# Altium PCB CH565W-R0-1v1.PcbDoc (part 2 of 4)
Units mil, origin at the board's own origin, x right, y up, seen from the top; angles counter-clockwise.
Board outline 3947.04 x 3947.04 mil, 4 copper layers (Top Layer, Layer 1, Layer 2, Bottom Layer), stack 23.756 mil thick; 204 components, 168 nets, 932 pads, 1005 vias.
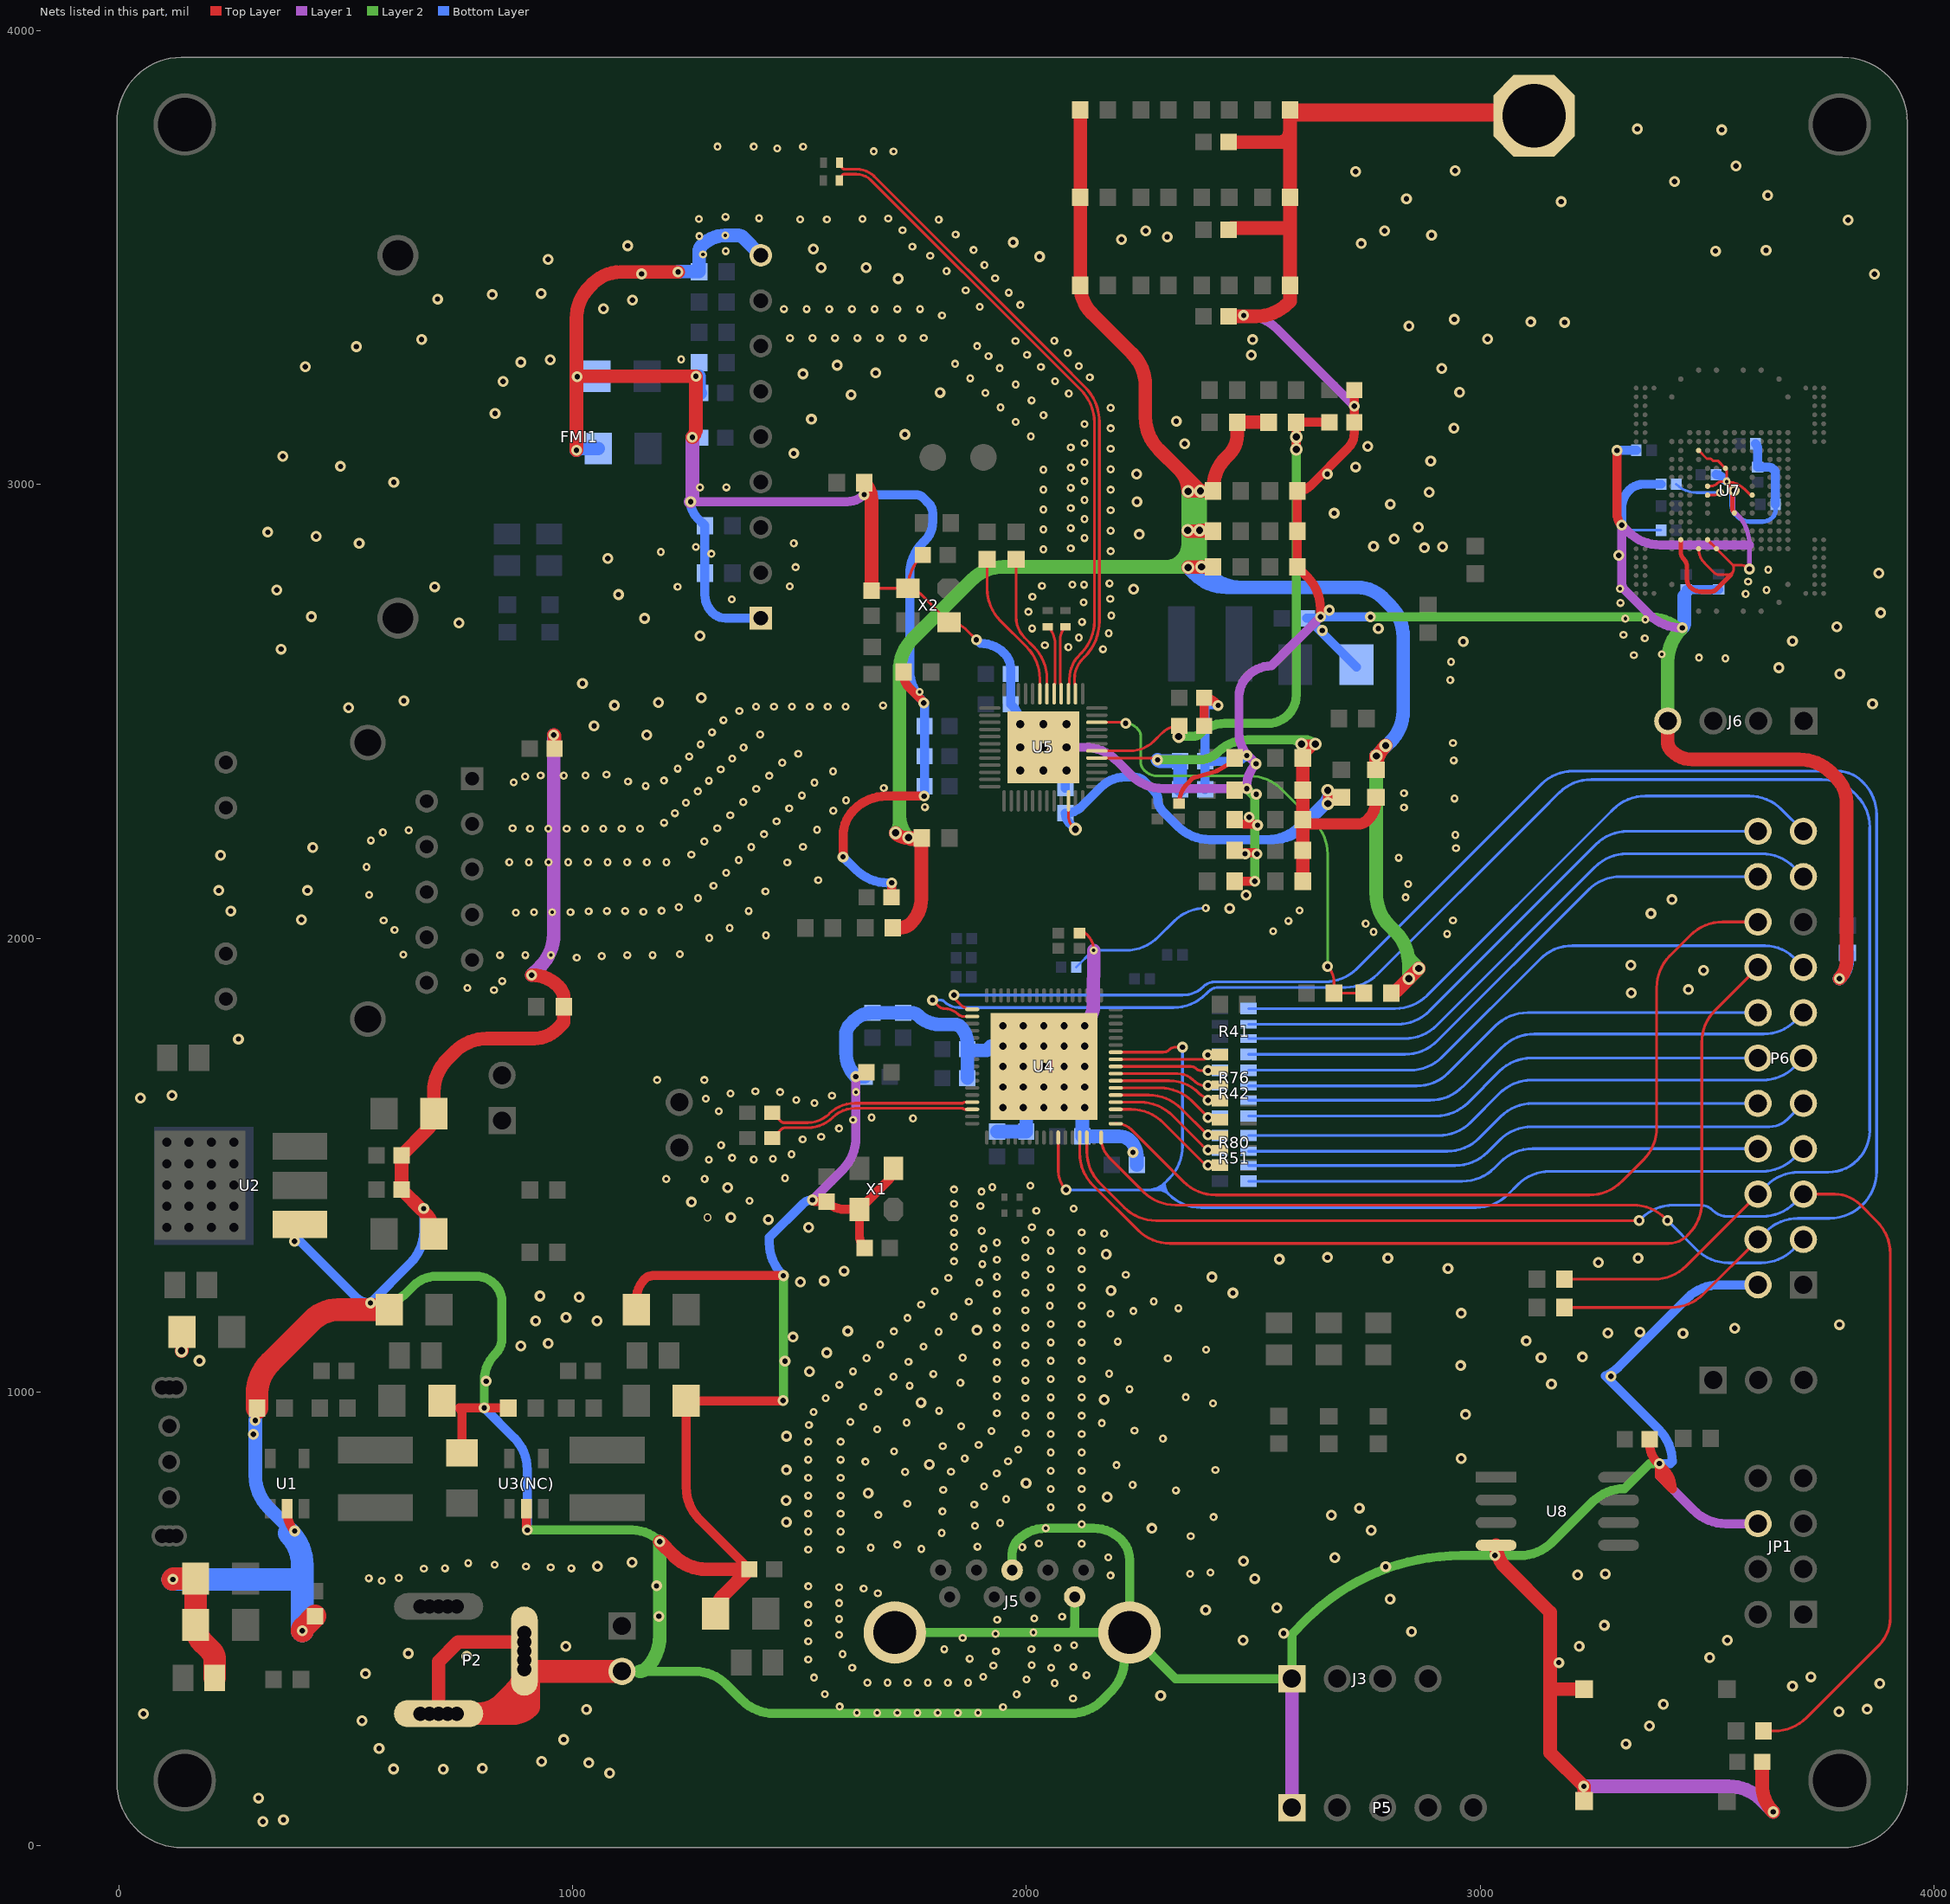
[diagram p4: the nets of this part, all layers, seen from the top]

## Via types
v1: diameter 17.72, hole 7.87, Top Layer to Bottom Layer, tented both sides, 564 vias
v2: diameter 24, hole 12, Top Layer to Bottom Layer, tented both sides, 371 vias
v3: diameter 28, hole 16, Top Layer to Bottom Layer, tented both sides, 64 vias
v4: diameter 26, hole 14, Top Layer to Bottom Layer, tented both sides, 2 vias
v5: diameter 19.68, hole 10, Top Layer to Bottom Layer, tented both sides, 1 vias
v6: diameter 20, hole 10, Top Layer to Bottom Layer, tented both sides, 1 vias
v7: diameter 32, hole 18, Top Layer to Bottom Layer, tented both sides, 1 vias
v8: diameter 17.72, hole 12, Top Layer to Bottom Layer, tented both sides, 1 vias

## Nets (pads, with @x,y where several pads share a name; then routed paths per layer and width w, separated by ;. In a path a pad name is that pad's centre, name@x,y a point inside that pad or via, vN(x,y) a via of type N, cw(c..) or ccw(c..) an arc to the next point about the centre after c; other vN are vias at no path point) (continued)
CMD_2: R79.1 U7.R5 | length 130.2
  Top Layer w6: U7.R5@3501.47,2976.74 3515.72,2976.74 ccw(c3515.72,2995.22) v1(3528.79,2982.15)
  Bottom Layer w6: R79.1@3432.34,3000.83 ccw(c3477.44,3045.93) 3477.44,2982.15 v1(3528.79,2982.15)
DATA0: R41.5 R76.1 U4.27 | length 235.5
  Top Layer w6: U4.27@2196.78,1732.87 2390.04,1732.87 ccw(c2390.04,1742.61) v2(2399.78,1742.61) 2426.52,1742.61 R76.1@2426.52,1742.82
DATA1: R42.4 R76.2 U4.26 | length 205.7
  Top Layer w6: U4.26@2196.78,1717.12 2362.17,1717.12 cw(c2362.17,1699.04) 2374.96,1711.83 ccw(c2383.66,1720.52) 2383.66,1708.22 v2(2400.13,1708.22)
DATA2: R42.3 R76.3 U4.25 | length 210.8
  Top Layer w6: U4.25@2196.78,1701.37 2333.33,1701.37 cw(c2333.33,1653.71) 2367.03,1687.41 2367.21,1687.24 ccw(c2400.13,1720.16) v2@2400.13,1673.6
  other v2: 2400.13,1675.6
DATA3: R42.2 R76.4 U4.24 | length 241.4
  Top Layer w6: U4.24@2196.78,1685.63 2314.57,1685.63 cw(c2314.57,1592.62) 2380.34,1658.38 ccw(c2419.81,1697.85) 2419.81,1642.03 R76.4@2426.52,1642.03
  other v2: 2400.13,1642.97
DATA4: R42.1 R80.1 U4.23 | length 252.2
  Top Layer w6: U4.23@2196.78,1669.88 2294.3,1669.88 cw(c2294.3,1569.88) 2365.01,1640.59 2390.65,1614.95 ccw(c2426.52,1650.83) R80.1@2426.52,1600.1
  other v2: 2400.13,1604.35
DATA5: R51.4 R80.2 U4.22 | length 234.4
  Top Layer w6: U4.22@2196.78,1654.13 2269.88,1654.13 cw(c2269.88,1554.13) 2340.59,1624.84 v2@2399.07,1566.36
  other v2: 2400.13,1566.73
DATA6: R51.3 R80.3 U4.21 | length 267.4
  Top Layer w6: U4.21@2196.78,1638.38 2250.8,1638.38 cw(c2250.8,1538.38) 2321.51,1609.09 2387.57,1543.03 ccw(c2409.48,1564.94) 2409.48,1533.95 R80.3@2426.52,1533.95
  other v2: 2400.13,1533.1
DATA7: R51.2 R80.4 U4.20 | length 275.9
  Top Layer w6: U4.20@2196.78,1622.63 2230.76,1622.63 cw(c2230.76,1522.63) 2301.47,1593.34 2391.19,1503.62 ccw(c2399.07,1511.5) 2399.07,1500.36 ccw(c2401.61,1502.89) 2401.61,1499.31 R80.4@2426.52,1499.31
  other v2: 2400.13,1499.48
DP_CLK: P6.16 U4.14 | length 2123.8
  Top Layer w6.07: U4.14@2117.33,1560.34 2117.33,1526.1 ccw(c2217.33,1526.1) 2146.62,1455.39 2245.57,1356.45 ccw(c2316.28,1427.16) 2316.28,1327.16 3415.48,1327.16 ccw(c3415.48,1385.38) 3456.65,1344.21 3459.6,1347.16 ccw(c3389.29,1417.47) 3488.72,1417.47 3488.72,1770.43 cw(c3588.72,1770.43) 3518.01,1841.14 P6.16@3612.66,1935.79
DP_D0: P6.8 R51.8 | length 1144.2
  Bottom Layer w6.07: R51.8@2489.51,1464.19 2960.97,1464.19 ccw(c2960.97,1564.19) 3031.68,1493.48 3044.7,1506.5 cw(c3115.41,1435.79) 3115.41,1535.79 P6.8@3612.66,1535.79
DP_D1: P6.9 R51.7 | length 1268.8
  Bottom Layer w6.07: R51.7@2489.51,1498.84 2945.61,1498.84 ccw(c2945.61,1598.84) 3016.32,1528.13 3043.18,1554.99 cw(c3113.89,1484.28) 3113.89,1584.28 3637.83,1584.28 ccw(c3637.83,1640.61) 3677.65,1600.78 P6.9@3712.66,1635.79
DP_D2: P6.10 R51.6 | length 1158.2
  Bottom Layer w6.07: R51.6@2489.51,1530.33 2927.82,1530.33 ccw(c2927.82,1630.33) 2998.53,1559.62 3045.4,1606.5 cw(c3116.12,1535.79) 3116.12,1635.79 P6.10@3612.66,1635.79
DP_D3: P6.11 R51.5 | length 1281
  Bottom Layer w6.07: R51.5@2489.51,1564.98 2908.65,1564.98 ccw(c2908.65,1664.98) 2979.36,1594.27 3042.87,1657.78 cw(c3113.58,1587.06) 3113.58,1687.06 3622.52,1687.06 ccw(c3622.52,1787.06) 3693.23,1716.35 P6.11@3712.66,1735.79
DP_D4: P6.12 R42.8 | length 1167.5
  Bottom Layer w6.07: R42.8@2489.51,1608.03 2902.69,1608.03 ccw(c2902.69,1708.03) 2973.4,1637.32 3042.58,1706.5 cw(c3113.29,1635.79) 3113.29,1735.79 P6.12@3612.66,1735.79
DP_D5: P6.13 R42.7 | length 1290.4
  Bottom Layer w6.07: R42.7@2489.51,1642.68 2890.2,1642.68 ccw(c2890.2,1742.68) 2960.91,1671.96 3048.37,1759.43 cw(c3119.08,1688.71) 3119.08,1788.71 3625.78,1788.71 ccw(c3625.78,1884.82) 3693.74,1816.86 P6.13@3712.66,1835.79
DP_D6: P6.14 R42.6 | length 1181.5
  Bottom Layer w6.07: R42.6@2489.51,1674.17 2860.13,1674.17 ccw(c2860.13,1774.17) 2930.84,1703.46 3033.87,1806.5 cw(c3104.58,1735.79) 3104.58,1835.79 P6.14@3612.66,1835.79
DP_D7: P6.15 R42.5 | length 1344.2
  Bottom Layer w6.07: R42.5@2489.51,1708.82 2845.71,1708.82 ccw(c2845.71,1808.82) 2916.42,1738.11 3132.47,1954.16 cw(c3203.18,1883.45) 3203.18,1983.45 3628.41,1983.45 cw(c3628.41,1895.11) 3690.88,1957.57 P6.15@3712.66,1935.79
DP_D8: P6.20 R41.4 | length 1276.9
  Bottom Layer w6.07: R41.4@2489.51,1743.93 2834.65,1743.93 ccw(c2834.65,1843.93) 2905.36,1773.22 3238.64,2106.5 cw(c3309.35,2035.79) 3309.35,2135.79 P6.20@3612.66,2135.79
DP_D9: P6.19 R41.3 | length 1400
  Bottom Layer w6.07: R41.3@2489.51,1778.58 2833.7,1778.58 ccw(c2833.7,1878.58) 2904.41,1807.87 3253.47,2156.93 cw(c3324.18,2086.22) 3324.18,2186.22 3620.81,2186.22 cw(c3620.81,2086.22) 3691.52,2156.93 P6.19@3712.66,2135.79
DP_D10: P6.22 R41.2 | length 1290.9
  Bottom Layer w6.07: R41.2@2489.51,1810.08 2817.37,1810.08 ccw(c2817.37,1910.08) 2888.08,1839.37 3255.21,2206.5 cw(c3325.92,2135.79) 3325.92,2235.79 P6.22@3612.66,2235.79
DP_D11: P6.21 R41.1 | length 1436.5
  Bottom Layer w6.07: R41.1@2489.51,1844.72 2812.59,1844.72 ccw(c2812.59,1944.72) 2883.3,1874.01 3282.19,2272.91 3293.33,2284.04 cw(c3364.04,2213.33) 3364.04,2313.33 3593.7,2313.33 cw(c3593.7,2213.33) 3664.41,2284.04 P6.21@3712.66,2235.79
DP_HREF: P6.5 R27.1 U4.15 | length 3176.3
  Top Layer w6.07: U4.15@2133.08,1560.34 2133.08,1529.93 ccw(c2233.08,1529.93) 2162.37,1459.21 2214.95,1406.63 ccw(c2285.66,1477.34) 2285.66,1377.34 v2(3350.77,1377.34) ; R27.1@3624.9,252.09 3648.7,252.09 ccw(c3648.7,352.09) 3719.41,281.37 3878.66,440.63 ccw(c3816.73,502.56) 3904.31,502.56 3904.31,1304.48 ccw(c3804.31,1304.48) 3875.02,1375.19 3837.65,1412.57 ccw(c3781.59,1356.5) 3781.59,1435.79 P6.5@3718.64,1435.79
  Bottom Layer w6.07: v2(3350.77,1377.34) 3355.64,1382.21 cw(c3426.35,1311.5) 3426.35,1411.5 3485.15,1411.5 cw(c3485.15,1372) 3513.08,1399.93 ccw(c3545.42,1432.27) 3545.42,1386.53 3621.99,1386.53 ccw(c3621.99,1486.53) 3692.7,1415.82 P6.5@3712.66,1435.79
DP_PWDN: P6.18 U4.18 | length 1936.4
  Top Layer w6.07: U4.18@2196.78,1591.14 2199.66,1591.14 cw(c2199.66,1546.52) 2231.21,1578.07 2346.1,1463.18 ccw(c2416.81,1533.9) 2416.81,1433.9 3241.27,1433.9 ccw(c3241.27,1533.9) 3311.99,1463.18 3360.01,1511.21 ccw(c3289.3,1581.92) 3389.3,1581.92 3389.3,1890.85 cw(c3489.3,1890.85) 3418.59,1961.56 3463.53,2006.5 cw(c3534.24,1935.79) 3534.24,2035.79 P6.18@3612.66,2035.79
DP_RESET: P6.7 U4.11 U4.28 | length 2382.8
  Top Layer w6: U4.11@2070.09,1560.34 2070.09,1486.96 ccw(c2129.33,1486.96) v2(2087.44,1445.06) ; U4.28@2196.78,1748.62 2301.85,1748.62 ccw(c2301.85,1767.37) 2315.11,1754.11 cw(c2328.37,1740.85) 2328.37,1759.6 v2(2343.86,1759.6)
  Bottom Layer w6: v2(2087.44,1445.06) 2268.26,1445.06 ; 2295.79,1446.3 2299.31,1449.83 ; 2303.99,1453.09 ccw(c2303.99,1449.66) 2301.57,1452.08 2299.31,1449.83 ; 2313.86,1435.28 ccw(c2384.57,1505.99) 2384.57,1405.99 2991.19,1405.99 ccw(c2991.19,1505.99) 3061.9,1435.28 3083.28,1456.66 cw(c3153.99,1385.95) 3153.99,1485.95 3621.4,1485.95 ccw(c3621.4,1585.95) 3692.11,1515.24 P6.7@3712.66,1535.79 ; v2(2343.86,1759.6) 2343.86,1540.73 cw(c2243.86,1540.73) 2314.57,1470.02 2304.72,1460.17 ; 2268.26,1445.06 ccw(c2268.26,1496.63) 2295.99,1453.15 ; 2268.26,1445.06 2290.24,1445.06 ; 2290.24,1445.06 cw(c2291.75,1445.06) 2290.68,1446.13 2296.85,1452.29 ; 2290.24,1445.06 cw(c2290.24,1411.67) 2313.85,1435.29 ; 2295.99,1453.15 ccw(c2268.26,1496.63) 2304.72,1460.17 ; 2295.99,1453.15 2296.85,1452.29 ; 2296.85,1452.29 2304.72,1460.17 ; 2296.85,1452.29 2299.31,1449.83 ; 2299.31,1449.83 2313.85,1435.29 ; 2304.72,1460.17 2304.72,1457.34 ccw(c2335.91,1457.34) 2313.85,1435.29
DP_SCL: P6.4 R65.1 U4.52 | length 3946.9
  Top Layer w6.07: v2@1834.14,1873.51 1853.32,1854.33 ccw(c1880.41,1881.43) U4.52@1880.41,1843.11 ; R65.1@3184.61,1185.93 3421.39,1185.93 ccw(c3421.39,1285.93) 3492.1,1215.22 P6.4@3612.66,1335.79
  Bottom Layer w6.07: v2(1840.14,1874.51) 2344.63,1874.51 ccw(c2344.63,1939.35) 2362.64,1877.06 ccw(c2344.63,1939.35) 2376.51,1882.88 ccw(c2344.63,1939.35) 2390.48,1893.5 cw(c2415.41,1868.57) 2415.41,1903.82 2657.99,1903.82 ccw(c2657.99,2003.82) 2728.7,1933.11 3090.62,2295.03 3134.64,2339.06 cw(c3205.35,2268.35) 3205.35,2368.35 3787.69,2368.35 cw(c3787.69,2291.49) 3842.04,2345.84 3844.77,2343.11 cw(c3774.06,2272.4) 3874.06,2272.4 3874.06,2228.03 3874.06,1486.1 cw(c3770.2,1486.1) 3770.2,1382.24 3700.54,1382.24 ccw(c3700.54,1282.24) 3629.83,1352.96 P6.4@3612.66,1335.79
DP_SDA: P6.6 R64.1 U4.53 | length 3909.3
  Top Layer w6.07: v2(1792.99,1863.44) 1806.45,1849.97 ccw(c1819.12,1862.64) 1819.12,1844.73 cw(c1819.12,1801.49) 1849.69,1832.07 ccw(c1861.05,1843.43) 1861.05,1827.36 U4.53@1880.41,1827.36 ; R64.1@3182.86,1248.07 3383.52,1248.07 ccw(c3383.52,1348.07) 3454.23,1277.36 P6.6@3612.66,1435.79
  Bottom Layer w6.07: v2(1792.99,1863.44) 1811.08,1863.44 cw(c1811.08,1852.38) 1818.89,1860.2 ccw(c1850.61,1891.92) 1850.61,1847.06 2324.48,1847.06 ccw(c2324.48,1947.06) 2395.19,1876.35 2400.98,1882.14 cw(c2423.81,1859.31) 2423.81,1891.6 2703.84,1891.6 ccw(c2703.84,1991.6) 2774.55,1920.88 3132.01,2278.35 3174.22,2320.55 cw(c3244.93,2249.84) 3244.93,2349.84 3753.73,2349.84 cw(c3753.73,2249.84) 3824.44,2320.55 3829.84,2315.15 cw(c3759.13,2244.44) 3859.13,2244.44 3859.13,2207.64 3859.13,1575.61 cw(c3767.56,1575.61) 3767.56,1484.05 3702.34,1484.05 ccw(c3702.34,1384.05) 3631.63,1454.76 P6.6@3612.66,1435.79
DP_SYNC: P6.3 U4.17 | length 1679.2
  Top Layer w6.07: U4.17@2164.58,1560.34 ccw(c2227.67,1560.34) 2183.06,1515.73 2257.9,1440.89 ccw(c2328.61,1511.6) 2328.61,1411.6 3337.44,1411.6 cw(c3337.44,1311.6) 3408.15,1382.31 v2(3413.12,1377.34)
  Bottom Layer w6.07: v2(3413.12,1377.34) 3476.94,1313.52 ccw(c3547.65,1384.23) 3547.65,1284.23 3619.68,1284.23 ccw(c3619.68,1384.23) 3690.39,1313.52 P6.3@3712.66,1335.79
DVDD10: C52.2 R56.2 U5.22 | length 1201.1
  Top Layer w6: U5.22@2092.35,2302.68 2092.35,2272.72 ccw(c2138.17,2272.72) v3@2105.77,2240.32
  Top Layer w20: v3(2663.95,2325.72) 2663.95,2297.9 ccw(c2665.54,2297.9) v3(2664.42,2296.78) ; 2665.42,2310.78 2665.59,2310.61 R56.2@2694.06,2310.61
  Bottom Layer w20: v3(2107.77,2240.32) 2094.9,2253.2 cw(c2117.29,2275.59) C52.2@2085.63,2275.59 ccw(c2085.63,2327.11) 2122.06,2290.68 2164.91,2333.53 cw(c2217.16,2281.29) 2217.16,2355.17 2237.13,2355.17 cw(c2237.13,2322.58) 2260.18,2345.63 2282.04,2323.77 cw(c2263.77,2305.51) 2289.6,2305.51 ccw(c2325.58,2305.51) 2300.12,2280.08 2333.6,2246.61 ccw(c2404.31,2317.32) 2404.31,2217.32 2530.53,2217.32 ; 2530.53,2217.32 ccw(c2530.53,2317.32) 2601.24,2246.61 ; 2530.53,2217.32 ccw(c2530.53,2317.32) 2601.24,2246.61 ; 2530.53,2217.32 2543.53,2217.32 ccw(c2543.53,2317.32) 2614.24,2246.61 v3(2664.42,2296.78) ; 2601.24,2246.61 v3@2652.36,2297.72 ; v3@2652.36,2297.72 ccw(c2624.36,2325.72) v3@2663.95,2325.72 ; v3@2652.36,2297.72 v3@2663.95,2309.32 ; v3@2663.95,2309.32 v3(2663.95,2325.72) ; v3@2663.95,2309.32 2663.95,2297.9 ccw(c2665.54,2297.9) v3(2664.42,2296.78) ; v3@2663.95,2309.32 v3@2664.42,2309.78 ; v3@2663.95,2325.72 cw(c2662.83,2324.6) 2664.42,2324.6 v3@2664.42,2309.78 ; v3(2664.42,2296.78) v3@2664.42,2309.78
DVDD33: R17.2 R18.1 R28.1 R35.2 R37.1 R39.1 R43.2 R53.1 R57.1 R63.2 R66.1 R70.1 | length 5174
  Top Layer w30: R43.2@1705.4,2023.17 1721.35,2023.17 ccw(c1721.35,2057.54) 1745.65,2033.23 ccw(c1691.21,2087.68) 1768.21,2087.68 1768.21,2217.84 1749.32,2217.84 cw(c1749.32,2231.33) v3@1740.88,2220.81 ; v3(1711.3,2232) ccw(c1738.32,2259.02) 1738.32,2220.81 v3@1740.88,2220.81 ; v3(1739.79,2221.79) ccw(c1749.32,2231.33) v3@1740.88,2220.81 ; R53.1@1769.44,2220.81 v3@1740.88,2220.81 ; R66.1@2118.6,3823.63 R57.1@2118.6,3633.33 R70.1@2118.6,3439.1 ccw(c2205.54,3439.1) 2144.06,3377.62 2232.9,3288.78 cw(c2162.19,3218.07) 2262.19,3218.07 2262.19,3148.47 ccw(c2362.19,3148.47) 2291.48,3077.76 2336.65,3032.6 ; v3(2356.23,2817.13) cw(c2359.28,2814.07) 2359.28,2818.39 v3@2386.09,2818.39 ; v3@2356.23,2897.13 R37.1@2411.47,2897.13 ccw(c2406.24,2891.9) 2406.24,2899.3 v3(2381.77,2899.3) ; v3(2385.96,2818.51) v3@2386.09,2818.39 ; R28.1@2411.47,2818.39 v3@2386.09,2818.39 ; R18.1@2533.95,3137.48 R17.2@2464.53,3137.48 2464.53,3108.65 cw(c2405.98,3108.65) 2447.39,3067.26 2440.76,3060.63 ccw(c2511.47,2989.92) 2411.47,2989.92 R39.1@2411.47,2985.87 v3@2383.72,2985.87 ; R63.2@2770.33,2371.24 R63.2@2770.33,2372.53 ; v3(2771.11,2401.8) ccw(c2773.01,2399.9) 2770.33,2399.9 R63.2@2770.33,2372.53 ; v3(2791.87,2424.54) ccw(c2843.89,2372.53) R63.2@2770.33,2372.53 ; v3(2842.78,1910.56) 2816.38,1884.17 cw(c2804.2,1896.36) R35.2@2804.2,1879.13 ccw(c2804.2,1895.41) 2815.71,1883.9 v3(2865.11,1933.29) ; 2336.65,3032.6 cw(c2289.38,2985.32) v3(2356.23,2985.32) cw(c2357.55,2984.01) 2357.55,2985.87 v3@2383.38,2985.87 ; 2336.65,3032.6 v3@2383.38,2985.87 ; v3@2383.38,2985.87 v3(2383.55,2985.7) v3@2383.72,2985.87 ; v3@2383.38,2985.87 v3@2383.72,2985.87
  Layer 2 w30: v3(2385.96,2818.51) v3@2382.96,2818.51 ; v3(2771.11,2401.8) 2771.11,2097.77 ccw(c2871.11,2097.77) 2800.4,2027.06 2813.49,2013.97 cw(c2742.78,1943.26) 2841.52,1959.04 ; 2839.87,1967.17 ccw(c2860.75,1967.17) 2841.52,1959.04 ; 1720.15,2269.2 ccw(c1787.2,2269.2) v3@1739.74,2221.84 ; 1720.15,2269.2 1720.15,2589.43 cw(c1820.15,2589.43) 1749.44,2660.14 1878.52,2789.22 cw(c1949.23,2718.51) 1949.23,2818.51 2306.75,2818.51 ; 1720.15,2269.2 1720.15,2253.37 cw(c1689.93,2253.37) v3(1711.3,2232) 1715.14,2232 cw(c1715.14,2197.14) v3@1739.74,2221.84 ; v3@1739.74,2221.84 ccw(c1787.2,2269.2) v3(1739.79,2221.79) ccw(c1715.14,2197.14) v3@1739.74,2221.84 ; 2306.75,2818.51 ccw(c2306.75,2868) 2356.23,2868 ; 2306.75,2818.51 v3@2356.23,2818.51 ; v3@2356.23,2818.51 2356.23,2868 ; v3@2356.23,2818.51 v3@2382.96,2818.51 ; 2356.23,2868 v3(2356.23,2985.32) 2377.51,2985.32 cw(c2377.51,2979.87) 2382.96,2979.87 v3@2382.96,2818.51 ; 2841.52,1959.04 cw(c2742.78,1943.26) 2842.78,1943.26 v3(2842.78,1910.56) 2865.11,1932.9 v3(2865.11,1933.29) 2845.99,1952.41 cw(c2860.75,1967.17) 2841.52,1959.04
  Bottom Layer w30: v3(2771.11,2401.8) 2802.4,2433.09 ccw(c2734.82,2500.67) 2830.39,2500.67 2830.39,2664.08 ccw(c2730.39,2664.08) 2801.1,2734.79 2786.27,2749.63 ccw(c2728.62,2691.99) 2728.62,2773.51 2472.39,2773.51 ; 2472.39,2773.51 cw(c2472.39,2873.51) 2401.68,2802.8 v3(2385.96,2818.51) 2359.58,2818.51 ccw(c2359.58,2813.78) v3(2356.23,2817.13) 2370.56,2802.8 ccw(c2441.27,2873.51) 2441.27,2773.51 2472.39,2773.51
  other v3: 2355.23,2899.13
DVDDLDO: C24.2 C25.2 R18.2 U5.30 | length 1235.8
  Top Layer w6: U5.30@2155.35,2412.92 2228.4,2412.92 ccw(c2228.4,2487.44) 2281.09,2434.75 2298.54,2452.2 cw(c2336.58,2414.16) C24.2@2336.58,2467.96
  Top Layer w20: v3(2594.92,3104.97) 2594.58,3105.31 R18.2@2594.58,3137.48 ; v3(2594.98,3077.36) 2594.98,3136.53 ccw(c2593.63,3136.53) R18.2@2594.58,3137.48 ; C25.2@2667.62,3137.48 R18.2@2594.58,3137.48
  Layer 2 w20: v3(2335.71,2444.71) 2368.06,2444.71 ccw(c2368.06,2463.26) 2381.18,2450.14 cw(c2437.35,2393.97) 2437.35,2473.41 2531.74,2473.41 ccw(c2531.74,2536.6) 2594.92,2536.6 v3(2594.92,3104.97)
DVDDREG: C55.2 C56.2 R30.1 R32.1 R45.1 R47.1 R49.1 R63.1 U5.29 | length 1190.3
  Top Layer w6: U5.29@2155.35,2397.17 2279.37,2397.17 cw(c2279.37,2383.51) v2(2289.04,2393.17)
  Top Layer w20: v3(2606.08,2427.9) 2606.24,2428.05 v3(2636.78,2428.05) 2611.27,2402.54 ccw(c2616.22,2397.59) R30.1@2609.22,2397.59
  Top Layer w25: R45.1@2609.22,2251.58 2729.73,2251.58 ccw(c2729.73,2283.39) 2752.23,2260.89 ccw(c2708.54,2304.59) 2770.33,2304.59 R63.1@2770.33,2310.61
  Top Layer w30: R49.1@2609.22,2125.57 2609.22,2251.58 R45.1@2609.22,2261.58 R32.1@2609.22,2326.58 2609.22,2377.59
  Layer 2 w20: v2(2289.04,2393.17) 2381.38,2393.17 ccw(c2381.38,2450.28) 2421.77,2409.9 cw(c2488.31,2343.36) 2488.31,2437.46 2582.99,2437.46 ; 2582.99,2437.46 cw(c2582.99,2404.81) v3(2606.08,2427.9) 2606.24,2428.05 v3(2636.78,2428.05) ccw(c2614.07,2405.34) 2614.07,2437.46 2582.99,2437.46
  Bottom Layer w30: v2(2289.04,2393.17) ccw(c2296.38,2400.51) 2296.38,2390.13 C55.2@2338.75,2390.13 C56.2@2338.75,2328.02
EX_n: C73.1 U4.65 | length 461.6
  Top Layer w6.07: C73.1@1439.59,1615.2 1458.68,1596.12 ccw(c1465.75,1603.2) 1465.75,1593.19 1517.84,1593.19 ccw(c1517.84,1659.82) 1564.96,1612.71 1565.06,1612.81 cw(c1621.14,1556.73) 1621.14,1636.04 1859.25,1636.04 cw(c1864.9,1630.39) 1864.9,1638.38 U4.65@1880.41,1638.38
EX_p: C74.1 U4.66 | length 461.8
  Top Layer w6.07: C74.1@1439.59,1559.12 1458.59,1578.12 cw(c1468.25,1568.47) 1468.25,1582.12 1517.88,1582.12 ccw(c1517.88,1659.72) 1572.75,1604.85 ; 1572.78,1604.88 cw(c1621.29,1556.37) 1621.29,1624.97 1859.25,1624.97 ccw(c1864.9,1630.62) 1864.9,1622.63 U4.66@1880.41,1622.63
GND: C1.1 C2.1 C3.1 C5.1 C6.1 C7.1 C8.1 C9.1 C10.1 C11.1 C13.1 C14.1 C15.1 C16.1 C17.1 C18.1 C19.2 C20.2 C21.2 C22.2 C23.2 C24.1 C25.1 C26.1 C27.2 C32.2 C33.2 C34.2 C35.1 C36.1 C37.1 C38.1 C39.1 C40.2 C41.1 C42.1 C43.1 C44.1 C45.1 C46.1 C47.2 C48.1 C49.1 C50.1 C51.1 C52.1 C53.2 C54.2 C55.1 C56.1 C57.1 C58.2 C59.1 C60.2 C61.2 C62.2 C63.2 C64.2 C65.1 C66.2 C67.2 C68.2 C69.2 C70.2 C75.1 D1.2 FMI1.1 FMI1.9 J3.1 J5.0 J5.4 J5.7 J6.4 JP1.6 P2.2 P2.3 P4.2 P5.1 P6.2 pad.@3119.01,3813.24 R3.1 R5.1 R6.2 R7.2 R14.2 R19.1 R23.1 R24.1 R29.2 R31.2 R33.2 R38.2 R40.2 R46.2 R48.2 R50.2 R55.2 R61.2 R69.2 R73.2 R79.2 R88.1 S1.2 S2.1 U1.2 U2.1 U3(NC).2 U4.0 U5.49 U7.AA4 U7.AA6 U7.K4 U7.M7 U7.P5 U7.R10 U7.U8 U7.Y2 U7.Y5 U8.4 X1.2 X1.4 X2.2 X2.4 | length 30073.7
  Top Layer w6: C57.1@1658.43,2766.06 cw(c1671.24,2753.25) 1671.24,2771.36 X2.2@1738.73,2771.36 ; C59.1@1767.5,2840.83 ccw(c1837.01,2771.36) X2.2@1738.73,2771.36 ; C59.1@1767.52,2840.85 C59.1@1771.58,2844.91 ; v2(1889.54,2657.88) 1866.12,2681.3 ccw(c1829.29,2644.47) X2.4@1829.29,2696.56 1765.62,2760.23 ccw(c1738.73,2733.34) X2.2@1738.73,2771.36 ; C27.2@2120.59,2017.59 2128.84,2012.55 2134.13,2007.26 cw(c2099.99,1973.12) v1(2148.27,1973.12) ; U7.AA4@3481.78,2858.63 ccw(c3527.17,2858.63) 3495.07,2826.53 3515.89,2805.72 ccw(c3526.21,2816.06) 3526.21,2801.45 3553.28,2801.45 ccw(c3539.21,2815.52) 3559.1,2815.52 3559.1,2818.04 ccw(c3552.73,2818.04) 3557.24,2822.54 ; U7.K4@3481.78,3075.16 3499.87,3057.07 3508.54,3057.07 3513.02,3052.59 3524.04,3052.59 U7.M7@3540.84,3035.79 cw(c3533.73,3028.68) 3543.78,3028.68 v1(3543.78,3006.83) ; U7.Y5@3501.47,2878.31 U7.AA6@3521.15,2858.63 3557.24,2822.54 ; U7.P5@3501.47,2996.42 3507.48,2996.42 ccw(c3507.48,3018.47) 3523.07,3002.88 cw(c3532.61,2993.34) 3532.61,3006.83 3540.67,3006.83 cw(c3540.67,2945.26) 3543.86,3006.75 cw(c3540.67,2945.26) 3584.2,2988.8 3593.7,2979.3 ccw(c3599.89,2985.49) U7.R10@3599.89,2976.74 ; v2(3593.91,2813.9) ccw(c3573.06,2793.06) 3573.06,2822.54 3557.24,2822.54
  Top Layer w10: C26.1@2336.45,2296.65 cw(c2399.14,2296.65) 2354.81,2340.98 2365.68,2351.84 cw(c2372.75,2344.77) 2369.98,2354.38 2419.52,2368.69 ccw(c2416.74,2378.3) 2421.68,2369.6 2444.69,2382.73 ccw(c2439.74,2391.42) 2446.81,2384.35 2457.39,2394.93 R31.2@2457.39,2395.91 ; R31.2@2459.06,2397.59 cw(c2471.6,2385.05) 2471.6,2402.78 v2(2485.8,2402.78) ; U7.Y2@3442.41,2878.31 3442.41,2851.32 ccw(c3464.41,2851.32) 3448.85,2835.77 cw(c3431.73,2818.65) 3455.95,2818.65 3455.95,2791.65 ccw(c3480.87,2791.65) 3463.25,2774.03 ccw(c3487.92,2798.7) 3487.92,2763.8 3508.09,2763.8 ccw(c3508.09,2782) 3520.96,2769.13 3553.28,2801.45 ; v1(3543.78,3006.83) cw(c3514.09,2977.14) 3543.86,3006.75 cw(c3514.09,2977.14) 3556.08,2977.14 3556.08,2948.09 ccw(c3571.25,2948.09) U7.U8@3560.52,2937.37
  Top Layer w20: U1.2@370.27,742.39 370.27,733 ccw(c426.68,733) v2(386.79,693.11) ; v2(553.86,1195.84) ccw(c589.51,1231.5) C2.1@589.51,1181.08 ; C11.1@755.6,865.01 755.6,950.24 ccw(c736.01,950.24) 749.86,964.09 R5.1@857.74,964.09 ; 897.4,742.39 897.4,700.36 ccw(c904.78,700.36) v2(899.56,695.14) ; C14.1@1139.85,1181.08 1139.85,1202.93 cw(c1204.83,1202.93) 1158.88,1248.88 cw(c1176.01,1231.75) 1176.01,1255.98 v2(1463.99,1255.98) ; C66.2@1389.06,608.6 1279.13,718.52 cw(c1349.85,789.23) 1249.85,789.23 C13.1@1249.85,980.05 1461.33,980.05 ccw(c1461.33,982.7) v2(1463.2,980.83) ; v2(1528.1,1422.92) ccw(c1537.12,1431.95) 1537.12,1419.18 C47.2@1558.97,1419.18 ccw(c1600.13,1460.34) 1600.13,1402.13 X1.4@1631.8,1402.13 ; v2(1595.59,2179.32) 1595.59,2224.95 cw(c1677.79,2224.95) 1619.67,2283.07 1620.44,2283.84 cw(c1691.15,2213.13) 1691.15,2313.13 v2(1774.36,2313.13) ; v2(1642.15,2977.88) 1642.47,2978.2 R19.1@1642.47,3004.25 ; C48.1@1643.26,1317 cw(c1670.95,1344.68) 1631.8,1344.68 X1.4@1631.8,1402.13 ; C39.1@1702.57,2090.31 1702.57,2121.89 v2(1702.67,2121.99) ; X1.2@1706.6,1492.68 cw(c1668.58,1492.68) 1695.46,1465.8 X1.4@1631.8,1402.13 ; R14.2@1728.92,2582.75 ccw(c1772.19,2582.75) 1741.59,2552.15 v2@1775.32,2518.42 ; C24.1@2391.58,2467.96 C17.1@2391.58,2530.02 cw(c2391.58,2495.97) 2415.66,2520.04 v2(2422.49,2513.21) ; 2479.06,2125.57 2503.11,2125.57 v2(2503.42,2125.25) ; v2@2479.06,2188.57 2500.84,2188.57 cw(c2500.84,2178.32) v2(2508.08,2185.57) ; 2479.06,2251.58 v2@2501.61,2251.58 ; v2(2648.19,2708.6) 2648.19,2726 ccw(c2548.19,2726) 2618.9,2796.71 R29.2@2597.22,2818.39 R38.2@2597.22,2897.13 R40.2@2597.22,2985.87 ccw(c2597.22,3026.61) 2626.03,2997.8 2709.17,3080.95 ccw(c2676.71,3113.41) 2722.62,3113.41 C25.1@2722.62,3137.48 v2(2722.62,3172.88) C18.1@2722.62,3208.28 ; v2(3032.56,639.01) ccw(c3025.78,645.78) 3035.36,645.78 U8.4@3035.36,661.58 ; v2(3301.61,3075.17) 3301.61,2935.84 ccw(c3337.39,2935.84) v2(3312.09,2910.53) ; C65.1@3374.03,895.12 3374.03,884.16 ccw(c3431.03,884.16) 3390.73,843.86 v2@3395.43,839.16 ; v2(3395.43,841.75) v2@3395.43,839.16 ; v2@3395.43,839.16 3405.92,828.67 cw(c3363.46,786.21) 3423.5,786.21 3395.43,814.29 v2@3395.43,839.16
  Top Layer w30: v3(137.58,1090.09) ccw(c135.8,1091.87) 138.32,1091.87 C3.1@138.32,1131.85 ; v2@667.57,1400.4 C8.1@622.28,1445.69 C6.1@622.28,1521.29 678.78,1577.78 ccw(c643.24,1613.32) C5.1@693.5,1613.32 693.5,1661.73 cw(c793.5,1661.73) 722.79,1732.44 739.92,1749.57 cw(c810.63,1678.86) 810.63,1778.86 914.52,1778.86 ccw(c914.52,1850.66) 965.29,1799.89 979.93,1814.53 R55.2@979.93,1848.76 979.93,1866.61 ccw(c943.04,1866.61) 969.13,1892.7 967.24,1894.58 ccw(c909.29,1836.63) v2(909.29,1918.59) ; v2@674.9,1393.07 cw(c630.01,1348.18) C7.1@693.5,1348.18 ; P2.2@704.07,290.45 703.92,290.61 703.92,405.06 747.1,448.25 P2.3@893.05,448.25 ; v2(957.83,2448.12) cw(c953.27,2443.56) 959.72,2443.56 C40.2@959.72,2418.14 ; v2(1008.01,3075.71) 1008.01,3365.86 cw(c1108.01,3365.86) 1037.3,3436.57 1043.9,3443.17 cw(c1105.36,3381.71) 1105.36,3468.63 v2(1231.99,3468.63) ; v2(1009.6,3237.62) cw(c1012.2,3235.03) 1012.2,3238.7 v2(1271.35,3238.7) 1271.35,3123.37 cw(c1244.23,3123.37) v2(1263.41,3104.19) ; v2(1191.67,669.83) 1223.61,637.89 ccw(c1294.32,708.6) 1294.32,608.6 C66.2@1389.06,608.6 1331.55,551.1 ccw(c1371.68,510.97) C70.2@1314.93,510.97 ; R19.1@1642.47,3004.25 cw(c1603.92,2965.7) 1658.43,2965.7 C57.1@1658.43,2766.06 ; C58.2@2445.39,3370.91 2506.13,3370.91 ccw(c2506.13,3470.91) 2576.84,3400.2 2581.05,3404.42 R73.2@2581.05,3439.1 2581.05,3565.6 ; C53.2@2445.39,3562.09 cw(c2453.86,3553.62) 2453.86,3565.6 2581.05,3565.6 ; C54.2@2450.39,3755.1 2560.43,3755.1 ccw(c2560.43,3771.04) 2571.7,3759.77 ccw(c2549.13,3782.34) 2581.05,3782.34 ; R69.2@2595.48,3820.24 cw(c2595.48,3840.64) R69.2@2581.05,3826.22 2581.05,3782.34 ; U8.4@3035.36,661.58 ccw(c3104.05,661.58) 3055.48,613.01 3154.59,513.9 3154.59,344.71 ; S1.2@3229.3,97.75 3229.3,128.81 ccw(c3227.27,128.81) v2(3228.7,130.24) 3154.59,204.36 3154.59,344.71 ; S2.1@3229.3,344.38 3154.92,344.38 3154.59,344.71 ; J6.4@3413.66,2478.72 3413.66,2433.31 ccw(c3442.52,2433.31) 3422.11,2412.91 ccw(c3467.87,2458.67) 3467.87,2393.96 3703.62,2393.96 cw(c3703.62,2293.96) 3774.33,2364.67 3785.13,2353.87 cw(c3730.58,2299.31) 3807.73,2299.31 3807.73,1948.61 cw(c3754.06,1948.61) v2(3792.01,1910.66) ; C33.2@3622.1,184.19 3622.1,131.62 ccw(c3703.82,131.62) v2(3646.03,73.83) ; 2581.05,3565.6 R61.2@2581.05,3633.33 2581.05,3782.34
  Top Layer w39.37: R69.2@2595.48,3820.24 pad.@3119.01,3820.24
  Top Layer w50: v2(118.37,586.36) cw(c122.65,582.08) 122.65,588.13 C9.1@168.31,588.13 C75.1@168.31,486.14 ccw(c224.61,486.14) 184.8,446.32 202.08,429.04 cw(c181.93,408.9) 210.43,408.9 D1.2@210.43,369.48 ; R3.1@303.6,964.09 303.6,993.9 cw(c403.6,993.9) 332.89,1064.61 425.24,1156.97 cw(c483.44,1098.77) 483.44,1181.08 C2.1@589.51,1181.08 ; v2(403.49,473.09) cw(c413.43,473.09) 406.39,480.1 C10.1@431.73,505.44 ; P2.2@704.07,290.45 P2.2@724.07,290.45 P2.2@744.07,290.45 P2.2@795.03,290.45 ; P2.3@893.05,408.25 cw(c870.71,385.91) 902.3,385.91 P2.3@902.3,383.74 ; P4.2@1108.22,383.63 904.2,383.63 cw(c904.2,399.4) P2.3@902.3,383.74 ; P2.2@795.03,290.45 ccw(c795.03,359.66) 843.97,310.72 872.93,339.68 ccw(c824.36,388.25) P2.3@893.05,388.25 ccw(c904.2,399.4) P2.3@902.3,383.74 ; P2.2@795.03,290.45 865.63,290.45 ccw(c865.63,342.31) 902.3,305.64 P2.3@902.3,383.74
  Layer 1 w10: 3558.4,2942.43 cw(c3560.64,2944.65) 3557.49,2944.65 3557.49,2981.47 cw(c3565.6,2981.47) v2(3559.86,2987.21) ; 3558.41,2942.42 3573.55,2927.28 cw(c3493.91,2866.81) 3593.91,2866.81 v2(3593.91,2813.9)
  Layer 1 w20: v2(1259.73,2962.37) 1604.7,2962.37 ccw(c1604.7,3015.33) v2(1642.15,2977.88) ; v2(1528.1,1422.92) 1594.55,1489.37 ccw(c1523.84,1560.08) 1623.84,1560.08 v2(1623.84,1694.8) ; U5.49@2088.42,2420.79 2127.85,2420.79 cw(c2127.85,2320.79) 2198.56,2391.5 2230.95,2359.12 ccw(c2301.66,2429.83) 2301.66,2329.83 v2(2485.62,2329.83) 2485.62,2334.78 cw(c2555.98,2334.78) v2(2506.23,2384.53) v2@2489.52,2401.24 ; v2(2478.89,3373.09) 2480.99,3373.09 cw(c2480.99,3273.09) 2551.71,3343.8 v2(2722.62,3172.88) ; v2(2485.8,2402.78) cw(c2485.8,2397.52) 2489.5,2401.26 cw(c2540.33,2452.06) 2468.46,2452.06 2468.46,2532.51 cw(c2531.66,2532.51) 2486.97,2577.19 2488.82,2579.04 cw(c2539.71,2528.15) 2539.71,2600.12 v2(2648.19,2708.6) ; v2(3395.43,841.75) 3395.43,814.29 3471.2,738.52 ccw(c3541.91,809.23) 3541.91,709.23 JP1.6@3612.66,709.23 ; v2(3446.04,2684.26) 3443.71,2684.26 cw(c3443.71,2784.26) 3373,2713.55 3318.98,2767.57 cw(c3335.61,2784.2) 3312.09,2784.2 v2(3312.09,2910.53) 3326.52,2896.1 ccw(c3397.24,2966.81) 3397.24,2866.81 3593.91,2866.81
  Layer 1 w30: v2(909.29,1918.59) 928.54,1937.84 ccw(c857.83,2008.55) 957.83,2008.55 v2(957.83,2448.12) ; v2(1259.73,2962.37) ccw(c1250.87,2971.24) 1263.41,2971.24 v2(1263.41,3104.19) ; U4.0@2128.17,1806.92 ccw(c2081.15,1853.94) 2147.64,1853.94 v1(2148.27,1973.12) ; P5.1@2585.09,83.11 J3.1@2585.09,367.45 ; v2(3228.7,130.24) 3548.2,130.24 cw(c3548.2,30.24) 3618.91,100.95 v2(3646.03,73.83)
  Layer 2 w20: v2(553.86,1195.84) 580.02,1195.84 ccw(c580.02,1270.97) 633.14,1217.85 649.45,1234.16 cw(c699.2,1184.4) 699.2,1254.77 785.23,1254.77 cw(c785.23,1195.06) 827.44,1237.28 cw(c788.35,1198.19) 843.64,1198.19 843.64,1118.18 cw(c794.99,1118.18) 829.39,1083.78 ccw(c889.06,1024.11) 804.67,1024.11 v2(804.67,964.49) ; v2(899.56,695.14) 1130.56,695.14 cw(c1130.56,608.72) v2(1191.67,669.83) ; P4.2@1108.22,383.63 1146.73,383.63 ; 1162.38,383.63 1268.11,383.63 cw(c1268.11,283.63) 1338.82,354.34 1373.31,319.85 ccw(c1444.02,390.56) 1444.02,290.56 2096.33,290.56 ccw(c2096.33,390.56) 2167.04,319.85 2186.71,339.52 ccw(c2116,410.23) 2216,410.23 J5.0@2216,469.17 ; v2(1463.2,980.83) ccw(c1461.3,982.73) 1463.99,982.73 v2(1463.99,1255.98) ; J5.0@1709.86,469.17 2099.63,469.17 ; J5.7@1968.52,606.96 1968.52,642.22 cw(c2013.47,642.22) 1981.68,674 cw(c2042.58,613.1) v1(2042.58,699.23) 2147.81,699.23 cw(c2147.81,613.1) 2208.71,674 cw(c2164.13,629.42) 2227.18,629.42 J5.0@2227.18,469.17 ; J5.4@2106.31,547.91 2106.31,485.3 cw(c2083.5,485.3) 2099.63,469.17 ; v2(2485.62,2329.83) 2503.74,2311.71 2503.74,2125.58 v2(2503.42,2125.25) ; v2(2758.4,2708.06) 3378.06,2708.06 cw(c3378.06,2616.28) v2@3442.95,2681.18 ; v2(3395.43,841.75) 3373.7,841.75 3318.17,786.21 ccw(c3318.17,686.21) 3247.46,756.93 3158.83,668.3 cw(c3088.12,739.01) 3088.12,639.01 v2(3032.56,639.01) 2957.9,639.01 ccw(c2957.9,156.96) 2617.03,497.82 2585.09,465.88 J3.1@2585.09,367.45 2328.9,367.45 J5.0@2227.18,469.17 ; 2099.63,469.17 J5.0@2216,469.17 ; J5.0@2216,469.17 J5.0@2227.18,469.17
  Layer 2 w30: 1146.73,383.63 ccw(c1146.73,404.85) 1161.74,389.84 1162.38,390.48 ccw(c1091.67,461.19) 1191.67,461.19 v2(1191.67,669.83) ; J6.4@3413.66,2478.72 3413.66,2610.46 cw(c3513.66,2610.46) v2@3442.95,2681.18
  Bottom Layer w6: C23.2@2109.81,1936.13 2145.77,1972.08 cw(c2148.27,1969.58) v1(2148.27,1973.12) 2219.29,1973.12 ccw(c2219.29,2073.12) 2290,2002.41 2324.64,2037.05 cw(c2395.35,1966.34) v1(2395.35,2066.34) v1@2395.77,2066.34 ; v2(3312.09,2910.53) ccw(c3338.83,2937.27) 3338.83,2899.46 C61.2@3398.87,2899.46
  Bottom Layer w10: v1@3540.78,3008.83 cw(c3507.34,2975.39) 3554.63,2975.39 3554.63,2953.01 ccw(c3580.18,2953.01) 3562.11,2934.95 3567.39,2929.67 ccw(c3594.4,2956.68) 3594.4,2918.48 3622.75,2918.48 ccw(c3622.75,2949.14) 3644.43,2927.46 ccw(c3627.68,2944.22) 3651.37,2944.22 C68.2@3651.37,2956.7
  Bottom Layer w20: v2(386.25,1331.6) 398.8,1331.6 520.9,1209.5 ccw(c553.86,1242.45) v2(553.86,1195.84) 641.82,1283.81 ccw(c571.11,1354.52) 671.11,1354.52 v2(671.11,1403.94) ; v2(804.67,964.49) 870.27,898.89 cw(c799.56,828.18) 899.56,828.18 v2(899.56,695.14) ; v2(1259.73,2962.37) ccw(c1311.51,2962.37) 1274.9,2925.76 R24.1@1291.18,2909.48 R23.1@1291.18,2804.76 1291.18,2757.51 ccw(c1347.48,2757.51) 1307.67,2717.7 ccw(c1337.11,2747.14) 1337.11,2705.51 FMI1.1@1414.36,2705.51 ; v2(1463.99,1255.98) 1462.47,1257.5 cw(c1533.18,1328.21) 1433.18,1328.21 1433.18,1340.48 1506.79,1414.09 cw(c1528.1,1392.78) v2(1528.1,1422.92) ; v2(1595.59,2179.32) 1623.64,2151.27 ccw(c1694.35,2221.99) 1694.35,2121.99 v2(1702.67,2121.99) ; v2(1642.15,2977.88) 1755.35,2977.88 cw(c1755.35,2954.18) 1772.11,2970.94 1784.19,2958.86 cw(c1761.88,2936.54) 1793.44,2936.54 1793.44,2918.2 cw(c1734.71,2918.2) 1776.24,2876.68 1771.81,2872.25 ccw(c1842.52,2801.54) 1742.52,2801.54 1742.52,2592.64 ccw(c1842.52,2592.64) v2@1771.81,2521.93 ; v2(1774.36,2313.13) ccw(c1771.93,2315.56) 1775.37,2315.56 C16.1@1775.37,2335.2 C42.1@1775.37,2401.28 C43.1@1775.37,2467.37 v2@1775.37,2518.37 ; 1898.46,2649.88 cw(c1898.46,2575.51) 1951.04,2628.1 cw(c1916.64,2593.69) 1965.29,2593.69 C41.1@1965.29,2582.46 C15.1@1965.29,2515.77 1969.77,2511.29 cw(c1930.45,2471.97) U5.49@1986.05,2471.97 ; C52.1@2085.63,2330.59 2085.63,2362.88 cw(c2095.15,2362.88) U5.49@2088.42,2369.61 ; C56.1@2393.75,2328.02 C55.1@2393.75,2390.13 ; v2(2422.49,2513.21) ccw(c2419.76,2510.48) 2419.76,2514.34 2393.75,2514.34 C55.1@2393.75,2390.13 ; v2(2485.8,2402.78) cw(c2455.26,2433.32) 2455.26,2390.13 C55.1@2393.75,2390.13 ; C45.1@2618.17,2705.28 2639.71,2705.28 ccw(c2639.71,2707.8) 2641.49,2706.02 2644.06,2708.6 v2(2648.19,2708.6) 2757.1,2708.6 cw(c2757.1,2706.75) v2(2758.4,2708.06) ; C45.1@2630.54,2695.07 C44.1@2727.47,2598.15 ; v2(3301.61,3075.17) cw(c3303.31,3073.47) 3303.31,3075.88 C60.2@3344.38,3075.88 ; v2(3312.09,2910.53) 3312.09,2947.39 cw(c3369.52,2947.39) 3328.91,2988 cw(c3359.88,2957.03) 3359.88,3000.83 R79.2@3398.87,3000.83 ; v2(3395.43,841.75) 3419.26,841.75 3423.5,845.98 ccw(c3323.5,845.98) 3394.21,916.7 3276.25,1034.66 ccw(c3234.85,1125.68) 3305.56,1054.97 3457.09,1206.5 cw(c3527.8,1135.79) 3527.8,1235.79 P6.2@3612.66,1235.79 ; C63.2@3454.09,2768.39 3524.91,2768.39 ccw(c3524.91,2770.11) C62.2@3526.13,2768.89 ; C67.2@3519.99,3021.86 cw(c3519.99,3003.12) 3533.23,3016.38 v1@3540.78,3008.83 ; C64.2@3607.22,3090.21 cw(c3595.99,3078.98) 3611.87,3078.98 C69.2@3611.87,3038.36 3633.96,3038.36 cw(c3633.96,3018.56) 3647.96,3032.56 cw(c3639.74,3024.34) 3651.37,3024.34 C68.2@3651.37,2956.7
  Bottom Layer w30: v2(299.87,937.08) 299.87,815.46 ccw(c399.87,815.46) 329.16,744.75 369.79,704.11 ; v2(1008.01,3075.71) cw(c1016.77,3066.96) 1016.77,3079.34 C21.2@1056.01,3079.34 ; v2@1017.34,3238.71 C19.2@1053.53,3238.71 ; v2(1231.99,3468.63) cw(c1234.05,3466.57) 1234.05,3469.48 R6.2@1278.35,3469.48 1278.35,3512.14 cw(c1300.7,3512.14) 1284.9,3527.94 cw(c1336.18,3476.66) v1(1336.18,3549.19) 1364.55,3549.19 cw(c1364.55,3534.39) 1375.01,3544.86 FMI1.9@1414.36,3505.51 ; v2@1278.35,3238.7 1278.35,3208.6 ccw(c1287.94,3208.6) C20.2@1281.16,3201.83 ; C34.2@1643.35,1694.32 1625.01,1694.32 cw(c1625.01,1695.96) v2(1623.84,1694.8) cw(c1676.5,1747.45) 1602.03,1747.45 1602.03,1787.43 cw(c1632.78,1787.43) 1611.04,1809.18 1621.09,1819.22 cw(c1660.22,1780.09) C35.1@1660.22,1835.43 ; C35.1@1660.23,1835.45 C32.2@1727.98,1835.45 1747.56,1835.45 cw(c1747.56,1816.62) 1760.87,1829.93 ccw(c1809.83,1878.89) 1809.83,1809.65 1842.69,1809.65 cw(c1842.69,1792.81) 1854.6,1804.72 cw(c1818.33,1768.45) 1869.62,1768.45 C38.1@1869.62,1755.37 ; C36.1@1869.62,1691.49 C38.1@1869.62,1755.37 ; C46.1@1935.23,1573.66 C49.1@1999.49,1573.66 1999.49,1611.47 ccw(c1977.73,1611.47) U4.0@1993.12,1626.86 ; U4.0@1948.1,1761.91 1921.98,1761.91 1912.35,1752.28 1887.49,1752.28 1887.41,1752.37 1872.62,1752.37 C38.1@1869.62,1755.37 ; U4.0@2128.17,1626.86 ccw(c2140.38,1614.65) 2123.11,1614.65 C50.1@2123.11,1563.26 2203.88,1563.26 cw(c2203.88,1526.68) 2229.75,1552.55 cw(c2197.32,1520.12) 2243.18,1520.12 C51.1@2243.18,1499.94 ; v2(3446.04,2684.26) ccw(c3436.12,2694.18) 3450.15,2694.18 3450.15,2753.79 ; v2(3792.01,1910.66) ccw(c3749.46,1953.21) 3809.64,1953.21 R88.1@3809.64,1967.68
  Bottom Layer w50: v2(118.37,586.36) 400.91,586.36 cw(c400.91,582.7) 403.49,585.29 ; 374.23,688.2 cw(c303.57,617.54) 403.49,617.54 403.49,585.29 ; v2(403.49,473.09) 403.49,585.29
  other v1: 1626.27,292.03 1670.75,292.03 1715.24,292.03 1759.72,292.03 1804.2,292.03 1848.68,292.03 1893.16,292.03 1948.22,304.86 1588.23,306.04 2102.52,323.71 1555.56,333.55 1978.47,332.81 2061.94,357.67 1649.4,358.67 1693.74,358.67 1738.08,358.67 1782.42,358.67 1826.76,358.67 1871.11,358.67 1999.91,365.74 1531.49,369.95 1904.79,371.38 2132.34,375.06 2054.48,391.63 1615.92,391.71 2103.35,393.28 1927.15,396.28 2011.39,397.12 1518.9,409.52 1874.78,411.29 1594.49,421.58 1932.57,427.9 1818.89,432.37 2010.88,432.77 2068.56,435.52 2105.01,441.32 1518.9,449.96 1859.45,457.28 1587.01,464.21 1931.82,466.36 2015.53,469.46 1518.9,490.39 1935.44,497.36 1587.01,499.13 2017.08,500.46 2078.5,504.27 1518.9,530.82 1587.01,534.06 1672.46,555.52 1641.1,565.97 1587.01,568.99 1518.9,571.26 578.71,583.31 550.22,588.73 616.25,589.64 2185.44,595.08 2360.73,598.61 2405.67,601.33 671.67,610 718.12,610.71 996.77,610.71 951.04,612.86 896.74,615 827.43,618.57 769.56,622.14 2180.25,634.68 1518.9,651.97 1590.3,651.97 1768.21,653.47 1656.5,656.22 1990.73,657.31 1892.03,658.43 1715.39,662.83 2027.5,665.33 2121.7,664.86 2362.09,681.68 1813.05,688.65 1518.9,691.63 1590.3,691.63 1886.53,704.65 2121.7,707.75 1942.04,710.76 2412.48,723.89 1673.31,728.59 1518.9,731.29 1590.3,731.29 1814.69,736.29 2053.63,745.04 2121.7,745.04 1884.88,751.43 1737.43,753.34 1955.14,763.15 1518.9,770.94 1590.3,770.94 2329.41,782.45 1816.41,783.54 2053.63,785.45 2121.7,785.45 1906.75,791.12 2234.09,794.7 1518.9,810.6 1590.3,810.6 1934.45,819.8 1732.56,823.21 1833.56,823.76 2053.63,825.86 2121.7,825.86 2416.56,827.38 2198.68,838.28 1644.82,845.96 1959.51,846.84 1518.9,850.26 1590.3,850.26 1863.97,852.92 2053.63,866.27 2121.7,866.27 1708.18,868.7 1981.93,872.56 1815.42,880.08 1894.55,882.78 1518.9,889.92 1590.3,889.92 2300.81,896.83 2053.63,906.68 2121.7,906.68 1998.74,908.83 1922.91,913.44 2238.18,914.53 1670.81,917.45 1856.04,923.95 1520.47,926.91 2166,930.87 1735.8,932.07 1611.59,933.53 1997.59,947.33 2053.63,947.09 2121.7,947.09 1934.84,952.54 1530.69,955.34 1807.3,958.07 1640.1,966.92 2411.12,974.45 1557.52,985.8 1997.59,986.06 2053.63,987.5 2121.7,987.5 2351.2,988.07 1934.84,990.17 1673.35,1000.03 2227.28,1005.77 1742.3,1013.31 1587.56,1015.28 1854.42,1019.81 1997.59,1024.78 1934.84,1027.81 2053.63,1027.91 2121.7,1027.91 1706.61,1033.14 1794.74,1039.11 2182.34,1039.81 1617.6,1044.75 1997.59,1063.51 1934.84,1065.44 1739.86,1066.25 2053.63,1068.32 2121.7,1068.32 1647.64,1074.23 2311.71,1073.86 1859.29,1075.05 2396.14,1092.92 1773.12,1099.36 1997.59,1102.23 1934.84,1103.07 1677.68,1103.7 2053.63,1108.73 2121.7,1108.73 2201.41,1110.62 1806.37,1132.47 1707.72,1133.18 1934.84,1140.71 1997.59,1140.95 2053.63,1149.14 2121.7,1149.14 1737.76,1162.65 1839.63,1165.58 2185.07,1171.9 1934.84,1178.34 2235.66,1177.96 1997.59,1179.68 2334.86,1184.16 2051.59,1189.55 2121.7,1189.55 1767.8,1192.13 1872.89,1198.69 2280.39,1199.14 1934.84,1215.98 1997.59,1218.4 1797.84,1221.6 2053.63,1229.96 2121.7,1229.96 1896.26,1240.96 1827.88,1251.07 1934.84,1253.61 1997.59,1257.13 2219.11,1257.69 2053.63,1270.37 2121.7,1270.37 1902.75,1281.4 1840.26,1287.64 1934.84,1291.24 1997.59,1295.85 2053.63,1310.78 2121.7,1310.78 1905.41,1315.36 1840.26,1319.32 1934.84,1328.88 1997.59,1334.58 2171.45,1348.93 1840.26,1351.01 2053.63,1351.19 2121.7,1351.19 1901.42,1354.65 2011.89,1362.77 1840.26,1382.7 2021.66,1398.96 2103.97,1403.92 1898.49,1409.32 1840.26,1414.39 1389.38,1420.92 1900.65,1441.24 1840.26,1446.08 1924.54,1451.04 2008.71,1454.22 1205.74,1469.08 1290.5,1469.08 1467.72,1471 1299.71,1511.56 1398.69,1512.18 1440.83,1513.38 1350.99,1515.76 1481.86,1523.5 1326.74,1543.59 1506.54,1556.34 1547.3,1561.96 1586.65,1580.57 1617.78,1599.17 1749.8,1602.75 1658.57,1604.54 1321.61,1618.61 1532.56,1636.59 1492.65,1643.17 1293.22,1646.12 1571.16,1652.82 1347.48,1657.65 1456.69,1660.72 1624.23,1660.72 1402.31,1662.47 1185.83,1687.4 1289.85,1687.4 826.04,1885.4 767.51,1890.23 844.3,1905.27 1008.59,1957.1 1063.75,1960.56 839.27,1962.56 895.39,1962.56 951.51,1962.56 1119.87,1962.56 1175.99,1962.56 626.27,1963.81 1235.94,1964.93 1300.73,2000.64 1425.61,2006.26 2927.17,2009.34 2765.29,2013.99 2543.8,2015.5 606.93,2018.11 1345.63,2022.51 2747.67,2032.08 2577.53,2037.99 582.75,2039.17 2940.28,2038.98 874.24,2056.18 914.41,2057.12 954.58,2057.43 994.75,2057.12 1155.43,2058.15 1034.92,2059.01 1075.09,2059.95 1115.26,2059.95 1195.6,2060.42 1387.64,2059.93 2601.97,2060.96 1233.55,2068.39 1275.76,2088.39 2835.82,2090 550.77,2095.33 1424.48,2103.09 1309.98,2115.47 2841.65,2119.15 1540.86,2127.74 1337.82,2143.92 545.31,2156.95 859.69,2167.53 903.04,2167.53 946.39,2167.53 989.74,2167.53 1033.09,2167.53 1076.44,2167.53 1119.79,2167.53 1163.14,2167.53 1206.5,2167.53 1472.83,2166.98 1365.66,2172.38 2820.46,2177.29 1261.21,2184.33 2946.97,2198.34 1393.49,2200.83 1507.36,2201.52 1289.81,2213.29 554.67,2215.45 2945.64,2227.55 1421.33,2229.29 581.19,2233.39 638.13,2238.07 1538.44,2238.93 905.45,2241.44 945.89,2241.44 986.33,2241.44 1026.77,2241.44 1067.2,2241.44 1107.64,2241.44 1148.08,2241.44 867.12,2242.51 1318.42,2242.24 1201.09,2254.48 1449.17,2257.74 1347.02,2271.2 1225,2275.56 1574.13,2280.95 1477.01,2286.2 2832.17,2288.29 1776.08,2288.91 1249.39,2298.81 1375.63,2300.16 1602.33,2303.97 2943.42,2307.89 1504.85,2314.65 2832.17,2319.78 1275.49,2323.77 1404.23,2329.11 1685.57,2331.31 1160.7,2335.56 869.68,2343.47 1532.69,2343.11 1121.76,2345.49 1200.89,2347.6 1299.88,2347.02 894.88,2356.31 979.86,2358.29 1432.83,2358.07 928.97,2358.78 1027.79,2358.78 1074.23,2360.76 1573.55,2367.86 1325.98,2371.98 1231.27,2373.7 1461.44,2387.03 2941.95,2391.87 1351.23,2396.08 1256.43,2400.41 1496.98,2406.34 1376.47,2420.18 1281.59,2427.12 2940.14,2430.37 1412.8,2448.91 1306.75,2453.84 1331.91,2480.55 1367.08,2501.02 1403.94,2510.58 1443.44,2510.58 1482.94,2510.58 1522.43,2510.58 1561.93,2510.58 1601.43,2510.58 1683.77,2513.1 1764.5,2543.05 2934.39,2569.15 2935.79,2609.14 3540.91,2616.92 3482.73,2618.58 3339.11,2623.84 3400.45,2626.06 2168.63,2637.09 2092.27,2641.64 2040.52,2645.74 3363.04,2661.37 2115.37,2662.7 3316.12,2668.88 2181.5,2672.09 2012.45,2682.87 2122.39,2697.2 3364.17,2702.46 3320.11,2704.58 2187.06,2711.3 2004.26,2719.71 3309.53,2739.12 2126.19,2740.18 1350.35,2747.03 2184.59,2748.04 2013.1,2752.62 3585.29,2759.08 3631.34,2767.5 3308.48,2770.49 1230.91,2774.63 1478.39,2775.66 2034.09,2776.44 2101.05,2779.66 2127.02,2779.18 2182.93,2782.05 3590.88,2786.14 3635.14,2812.4 1491.11,2817.92 1305.26,2847.46 1193.78,2851.42 2185.58,2853.23 2037.45,2857.27 2097.61,2859.73 1271.18,2862.45 1487.02,2870.63 2127.88,2882.26 2185.58,2898.38 2037.45,2901.13 2097.61,2904.13 2127.88,2924.09 2185.58,2943.54 2037.45,2944.98 2097.61,2948.54 2127.88,2965.92 2037.45,2988.83 2185.58,2988.7 1280.17,2993.58 2097.61,2992.94 1338.45,2993.92 2127.88,3007.75 2037.45,3032.69 2185.58,3033.85 2097.61,3037.35 2127.88,3049.58 2185.58,3079.01 2097.61,3081.75 2127.88,3091.42 2009.42,3106.21 2185.58,3124.16 2127.88,3133.25 1976.06,3138.23 2037.57,3152.91 2185.58,3169.32 1942.7,3170.26 2011.3,3185.59 2093.27,3200.79 1909.35,3202.29 1976.06,3220.83 2062.96,3227.94 1875.99,3234.31 2139.67,3236.64 1940.82,3256.71 2031.81,3259.32 2115.68,3261.42 1842.63,3266.34 1238.82,3276.11 1916.41,3283.21 2001.27,3286.2 2090.9,3290.41 1891.48,3305.41 1975.7,3316.51 2061.38,3317.04 1478.6,3323.02 1528.2,3323.02 1577.8,3323.02 1627.39,3323.02 1676.99,3323.02 1726.59,3323.02 1773.41,3323.16 1813.78,3372.79 1465.4,3386.86 1515.38,3386.86 1565.35,3386.86 1615.33,3386.86 1665.31,3386.86 1715.28,3386.86 1765.26,3386.86 1897.06,3391.79 1986.44,3396.05 1960.8,3423.16 1866.09,3428.4 1930.78,3454.92 1823.85,3470.64 1907.18,3484.06 1787.71,3504.43 1286.86,3507.45 1337.22,3514.7 1883.32,3517.27 1748.55,3524.53 1278.86,3547.79 1843.92,3551.48 1726.78,3560.81 1806.6,3584.14 1501.15,3584.7 1559.96,3584.7 1277.98,3585.72 1638.36,3585.78 1410.41,3587.24 1695.16,3586.73 1336.63,3590.13 1706.97,3734.61 1663.18,3734.74 1450.49,3741.08 1319.08,3745.3 1398.77,3745.3 1507.5,3744.86
  other v2: 316.87,52.62 362.05,56.23 307.23,104.3 1081.22,159.38 604.92,168.39 714.22,168.06 800.74,169.77 1035.32,181.8 930.96,185.19 572.88,213.93 3321.56,223.56 979.79,233.17 3373.55,263.48 534.93,274.65 53.38,289.83 3791.44,294.54 1029.99,299.32 3853.45,300.1 3404.18,310.83 2295.86,330.32 3688.7,351 3881.22,356.56 3729.43,371.37 542.79,378.41 3173.58,402.84 3506.3,413.87 766.33,416.88 637.41,423.12 984.32,439.08 3218.51,438.78 2477.52,452.34 3545.29,451.93 2566.86,467.24 2849,471.48 3273.81,485.09 1189.65,504.93 2395.07,518.73 2551.97,523.49 2801.52,542.71 1184.49,571.99 2503.16,588.01 3215.05,596.38 3275.88,598.46 2791.92,614.54 1054.3,615.46 1130.43,623.8 2478.34,626.89 2679.9,634.2 2759.96,694.25 2276.52,698.87 1470.74,712.68 2672.2,728.12 2733.79,743.51 1470.01,760.29 2177.83,767.85 1650.99,776.26 1999.06,798.34 1470.74,827.68 1785.92,839.82 2958.57,852.83 1471.12,901.93 295.8,906.32 2967.81,949.82 1767.38,976.31 2171.52,982.37 3157.21,1017.04 809,1023.34 3288.3,1034.09 1521.87,1044.61 2957.03,1057.59 1467.71,1067.59 3134.45,1075.15 3225.85,1076.66 1559.61,1086.19 885.53,1100.73 945.8,1106.56 3101.81,1111.96 1485.22,1120.65 3281.96,1129.26 3447.28,1128.76 3352.59,1131.77 1606.11,1133.78 1890.75,1135.9 3561.17,1140.17 3792.37,1147.96 918.12,1156.44 1052.93,1156.3 985.02,1163.96 2958.57,1173.06 1013.71,1208.91 927.58,1211.1 2455.12,1217.71 2186.24,1223.18 1501.76,1242.35 1553.87,1244.53 2408.93,1253.12 1598.02,1266.24 2929.32,1271.6 3260.84,1285.05 2557.34,1292.24 2796.68,1294.58 3348.17,1294.56 2663.71,1296.15 2175.72,1303.1 1519.85,1362.5 1430.83,1379.87 1348.33,1384.21 1261.48,1418.22 1341.51,1450.31 2234.78,1527.89 46.73,1647.54 116.09,1653.54 262.75,1777.59 3333.43,1879.25 3459.06,1886.64 3492.84,1928.86 3332.38,1940.48 401.59,2040.35 3376.71,2054.49 245.77,2059.7 2447.71,2065.76 3423.17,2085.11 2484.07,2095.16 219.64,2105.19 415.14,2105.19 223.51,2182.61 2482,2186 426.75,2200.03 2509.58,2249.1 2491.01,2266.49 2506.61,2317.32 1163.17,2448.14 1046.9,2468.26 505.71,2508.11 1091.65,2513.35 3865.13,2516.6 1773.32,2518.42 1188.42,2519.66 627.34,2523.45 1283.08,2530.18 1021.18,2561.25 3792.83,2582.51 3658.88,2596.33 356.54,2637.21 2962.8,2654.03 3688.65,2654.8 1280.18,2666.41 2651.96,2678.38 2775.71,2682.86 3786.45,2686.7 748.76,2695.2 1157.93,2705.08 423.69,2708.94 3883.2,2717.53 2667.76,2723.15 1100.55,2757.48 347.16,2767.59 2236.17,2769.36 695.35,2774.56 3878.95,2804.7 1076.85,2837.32 3305.36,2843.66 2877.47,2860.74 2917.43,2862.79 2765.19,2863.82 529,2870.71 2810.31,2880.28 434,2885.92 2248.42,2890.28 327.55,2895.13 2863.98,2905.89 2678.35,2936.86 2802.25,2956.75 2243.52,2962.18 2887.76,2983.33 605.3,3005.01 2242.7,3023.46 2663.29,3023.51 2725.48,3038.8 487.79,3040.11 2891.18,3051.78 360.52,3062.46 1486.91,3068.73 2752.14,3084.29 2348.71,3089.8 1732.04,3110.5 2942.43,3124.5 2330.32,3139.6 1525.94,3144.06 828.51,3156.66 1613.58,3198.15 1809.42,3202.94 2954.89,3203.45 845.99,3227.21 1507.45,3244.03 1667.68,3246.08 2915.42,3256.09 409.96,3259.87 1582.77,3263.2 885.47,3269.92 950.19,3275.1 2495.78,3285.81 522.89,3304.13 2498.53,3319.63 666.48,3319.76 3016.31,3320.76 2843.24,3349.45 3186.2,3357.56 3111.63,3358.7 2943.19,3364.26 1067.69,3387.83 1131.44,3406.78 701.81,3409.02 822.17,3418.84 929.86,3421.43 1717.12,3454.04 1151.25,3464.5 3869.29,3463.85 1547.29,3478.3 1646.76,3478.3 945.36,3496.38 2028.88,3502.56 3519.03,3514.96 3630.52,3516.6 1530.31,3519.54 1121.1,3526.53 2737.86,3531.33 1970.65,3534.1 2209.62,3540.17 2310.31,3546.23 2893.07,3549.81 2263,3559.58 2789.6,3559.67 3811.41,3583.24 3178.85,3623.72 2837.64,3629.88 3634.13,3637.5 3428.91,3668.07 2725.54,3690.24 2944.93,3691.77 3564.41,3702.56 3532.83,3782.22 3346.51,3784.03
  other v4: 176.95,1068.14
  other v8: 1296.83,1384.22
HSI_n: C31.1 U5.39 | length 1429.1
  Top Layer w6.07: C31.1@1587.65,3670.39 1590.52,3673.26 ccw(c1585.78,3678.01) 1592.49,3678.01 1592.49,3678.27 cw(c1598.56,3678.27) 1594.27,3682.56 cw(c1598.56,3678.27) 1598.56,3684.34 1625.41,3684.34 cw(c1625.41,3639.7) 1656.97,3671.27 2064.11,3264.13 2120.43,3207.81 cw(c2049.72,3137.1) 2149.72,3137.1 2149.72,2698.8 cw(c2049.72,2698.8) 2120.43,2628.09 2116.53,2624.18 ccw(c2169.24,2571.47) 2094.69,2571.47 2094.69,2563.07 cw(c2090.7,2563.07) 2093.52,2560.25 ccw(c2096.35,2557.42) 2092.35,2557.42 U5.39@2092.35,2538.9
HSI_p: C30.1 U5.38 | length 1446.3
  Top Layer w6.07: C30.1@1587.84,3709.36 1590.71,3706.49 cw(c1585.97,3701.74) 1592.68,3701.74 1592.68,3701.48 ccw(c1598.75,3701.48) 1594.45,3697.19 ccw(c1598.75,3701.48) 1598.75,3695.41 1625.45,3695.41 cw(c1625.45,3639.8) 1664.77,3679.12 2071.93,3271.96 2128.33,3215.56 cw(c2049.98,3137.2) 2160.79,3137.2 2160.79,2698.77 cw(c2049.79,2698.77) 2128.28,2620.28 2124.36,2616.35 ccw(c2169.24,2571.47) 2105.76,2571.47 2105.76,2563.07 ccw(c2109.76,2563.07) 2106.93,2560.25 cw(c2104.11,2557.42) 2108.1,2557.42 U5.38@2108.1,2538.9
HSO_CK_n: R15.2 U5.43 | length 335.7
  Top Layer w6: R15.2@1913.28,2835.12 1913.28,2770.68 ccw(c2013.28,2770.68) 1942.57,2699.97 2000.07,2642.47 cw(c1929.36,2571.76) 2029.36,2571.76 U5.43@2029.36,2538.9
HSO_CK_p: R16.2 U5.42 | length 317.3
  Top Layer w6: R16.2@1977.14,2835.12 1977.14,2708.23 ccw(c2042.31,2708.23) 1996.19,2662.19 ; 1996.23,2662.15 2015.82,2642.56 cw(c1945.11,2571.85) 2045.11,2571.85 U5.42@2045.11,2538.9
HSO_n: C29.1 U5.41 | length 152.7
  Top Layer w6.07: C29.1@2047.23,2686.71 cw(c2008.67,2648.15) 2063.2,2648.15 2063.2,2563.07 cw(c2059.2,2563.07) 2062.03,2560.25 ccw(c2064.85,2557.42) 2060.86,2557.42 U5.41@2060.86,2538.9
HSO_p: C28.1 U5.40 | length 151.6
  Top Layer w6.07: U5.40@2076.61,2538.9 2076.61,2557.42 ccw(c2072.61,2557.42) 2075.44,2560.25 cw(c2078.26,2563.07) 2074.27,2563.07 2074.27,2657.81 cw(c2115.13,2657.81) C28.1@2086.23,2686.71
INTB: R35.1 R36.1 U5.34 | length 1060.9
  Top Layer w6: U5.34@2155.35,2475.91 2186.16,2475.91 ; 2187.54,2476.07 cw(c2186.16,2481.91) 2186.16,2475.91 ; v2(2218.68,2473.8) ccw(c2213.58,2468.7) 2213.58,2475.91 2186.16,2475.91 ; v2(2663.89,1937.58) cw(c2630.17,1903.86) 2677.86,1903.86 R36.1@2677.86,1879.13 R35.1@2743.57,1879.13
  Layer 2 w6: v2(2218.68,2473.8) cw(c2218.68,2440.07) 2242.53,2463.92 2245.76,2460.69 cw(c2231.12,2446.05) 2251.83,2446.05 2251.83,2389.59 ccw(c2279.93,2389.59) 2260.06,2369.72 ccw(c2289.34,2399) 2289.34,2357.59 2491.62,2357.59 cw(c2491.62,2257.59) 2562.33,2328.3 2634.6,2256.03 cw(c2563.89,2185.32) 2663.89,2185.32 v2(2663.89,1937.58)